# Altium PCB PCB1.PcbDoc
Units mm, origin at the board's own origin, x right, y up, seen from the top; angles counter-clockwise.
Board outline 33.6 x 35.4 mm, 2 copper layers (Top Layer, Bottom Layer), stack 1.671 mm thick; 28 components, 12 nets, 67 pads, 14 vias.
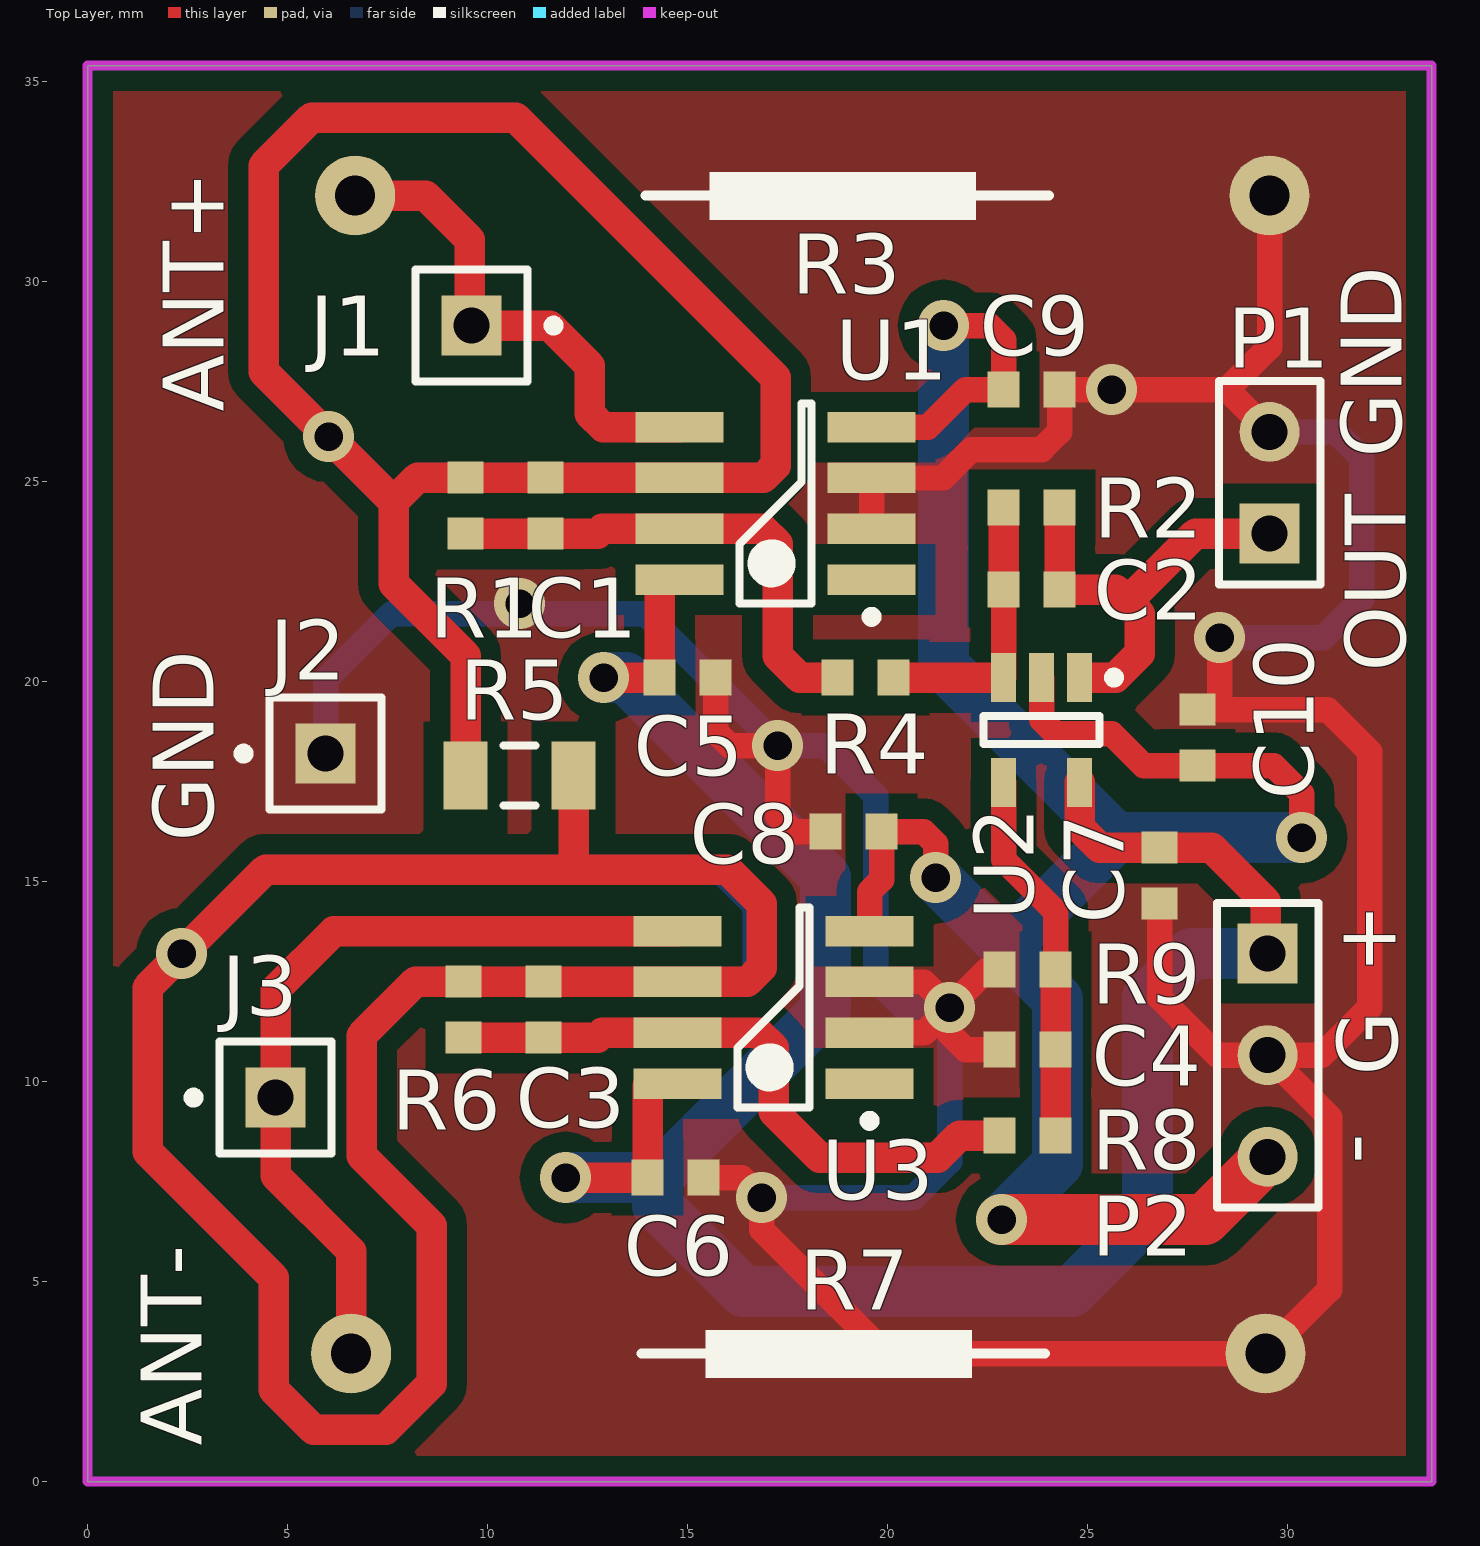
[diagram p0: Top Layer view]
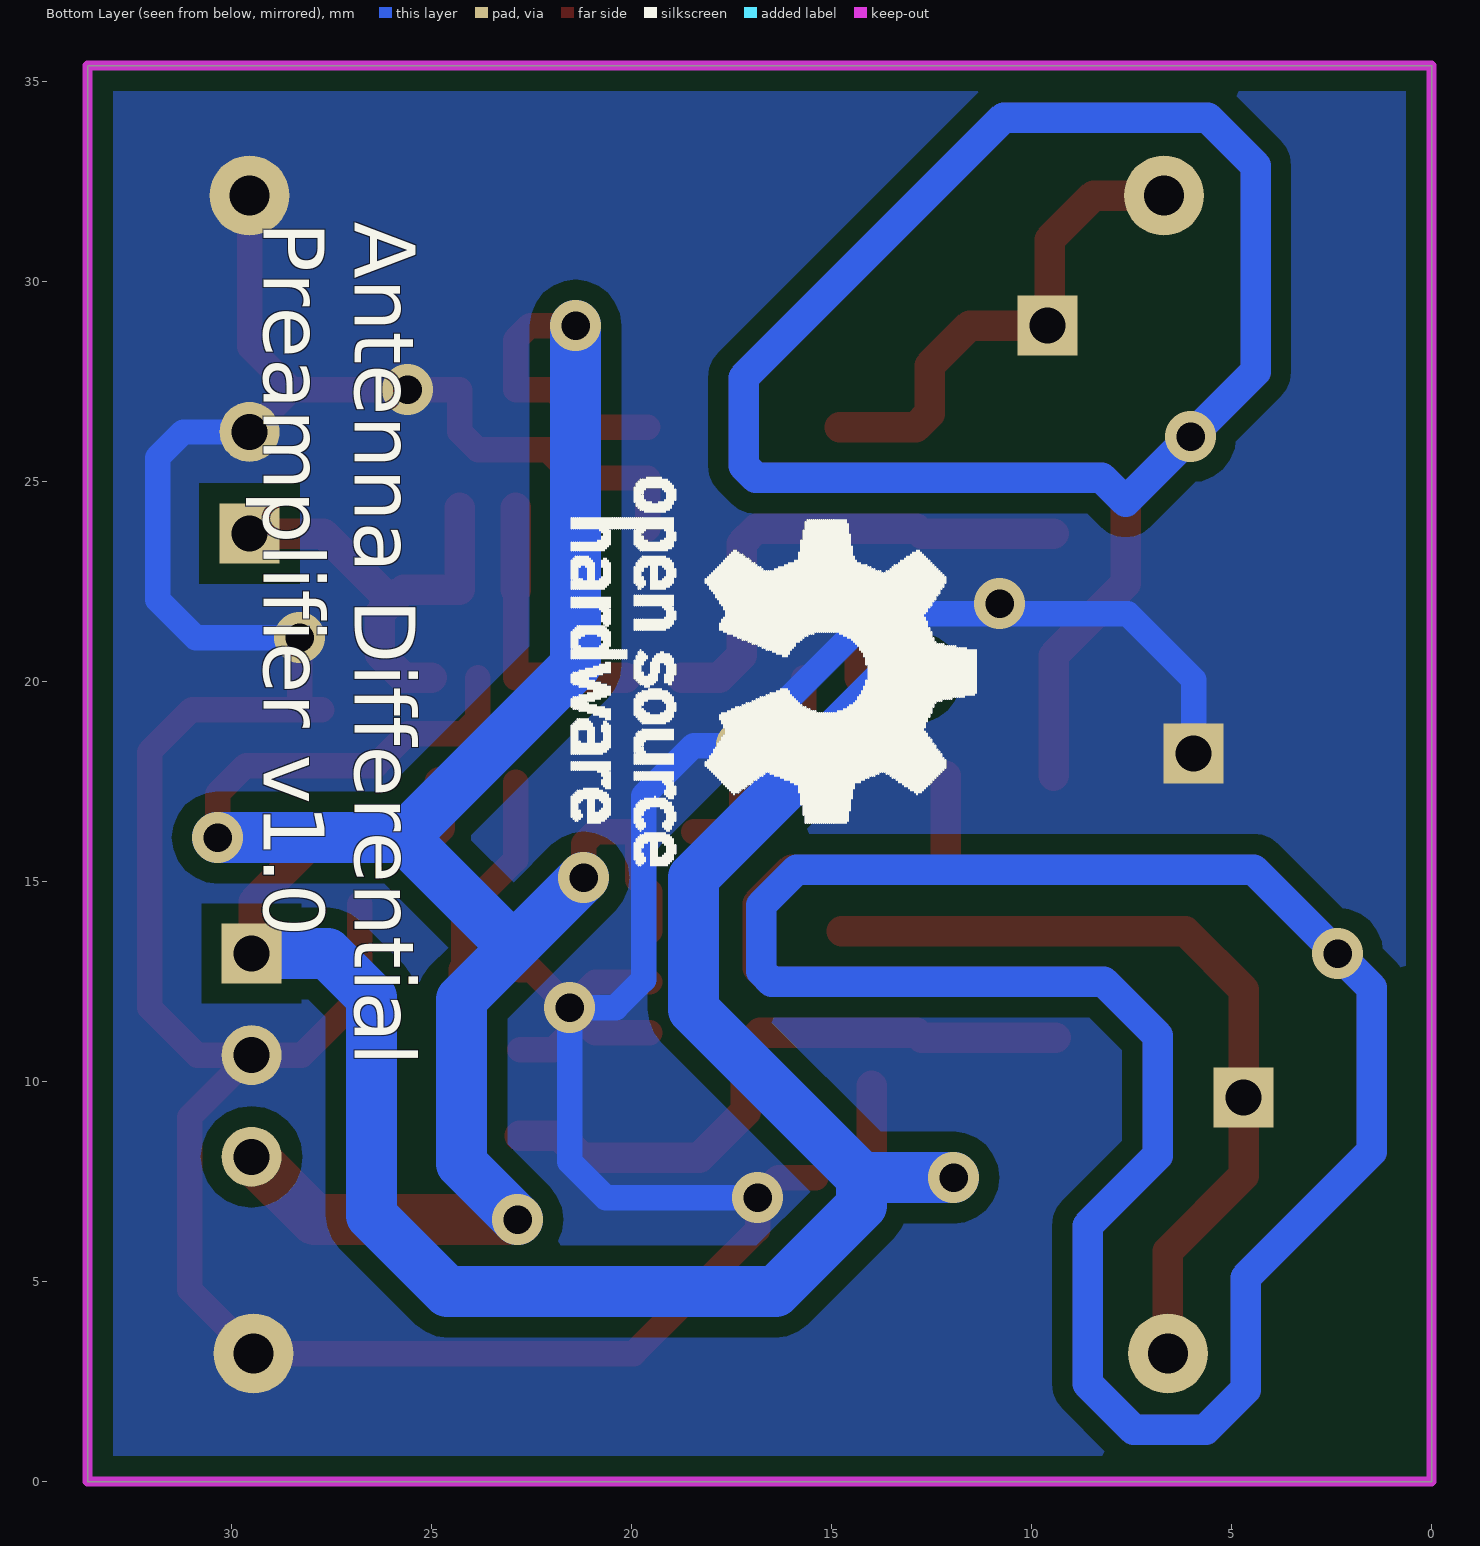
[diagram p1: Bottom Layer view, seen from below]

## Layer stack, top to bottom
Top Solder: solder mask 0.0102, Solder Resist, Dk 3.5
Top Layer: signal copper 0.0356
Dielectric1: core 1.6, FR-4, Dk 4.8
Bottom Layer: signal copper 0.0356
Bottom Solder: solder mask 0.0102, Solder Resist, Dk 3.5

## Board outline
0,0 0,35.4 33.6,35.4 33.6,0

## Design rules (kind name [scope] priority, off if disabled: settings)
Clearance Clearance_3 [InNamedPolygon('bottom_GND') vs not InNet('GND')] p1: gap=0.508
Clearance Clearance_2 [InNamedPolygon('top_GND') vs not InNet('GND')] p2: gap=0.508
Clearance Clearance_1 [OnLayer('Bottom Layer') vs OnLayer('Bottom Layer')] p3: gap=0.279
Clearance [OnLayer('Top Layer') vs OnLayer('Top Layer')] p4: gap=0.279
ComponentClearance [All] p1: gap=0 collisioncheckmode=3 verticalgap=0 showdistances=FALSE
DiffPairsRouting [All] p1: maxlimit=2.54 minlimit=0.203 mostfreqgap=0.254 toplayer_minwidth=0.381 toplayer_maxwidth=0.381 toplayer_prefwidth=0.381 bottomlayer_minwidth=0.381 bottomlayer_maxwidth=0.381 bottomlayer_prefwidth=0.381 maxuncoupledlength=12.7
MinimumSolderMaskSliver [All] p1: minsoldermaskwidth=0
PlaneConnect [All] p1: planeconnectstyle=Direct reliefexpansion=0.508 reliefentries=4 reliefconductorwidth=0.254 reliefairgap=0.254
PolygonConnect [All] p1: connectstyle=Direct reliefconductorwidth=0.254 reliefentries=4 polygonreliefangle="90 Angle" airgapwidth=0.254
RoutingVias [All] p1: holewidth=0.3 width=0.6 viastyle="Through Hole" minholewidth=0.3 minwidth=0.6 maxholewidth=0.3 maxwidth=0.6
SilkToSilkClearance [All] p1: silktosilkclearance=0
SilkToSolderMaskClearance SilkscreenOverComponentPads [IsPad] p1: minsilkscreentomaskgap=0 clearancetoexposedcopper=TRUE
SolderMaskExpansion [All] p1: expansion=0.102
Width [All] p1: maxlimit=2.54 minlimit=0.203 preferedwidth=0.254
24 further rules are at their usual default settings.

## Components (designator, comment, footprint, x,y, rotation, side; value= is the part's Value field where it differs from the comment)
C1 "0603" 1608[0603] 11.45,24.4 r90 top
C2 "0603" 1608[0603] 23.6,22.3 r180 top
C3 "0603" 1608[0603] 11.4,11.8 r90 top
C4 "0603" 1608[0603] 23.5,10.8 r0 top
C5 "0603" 1608[0603] 15,20.1 r180 top
C6 "0603" 1608[0603] 14.7,7.6 r180 top
C7 "0603" 1608[0603] 26.8,15.15 r90 top
C8 "0603" 1608[0603] 19.15,16.25 r0 top
C9 "0603" 1608[0603] 23.6,27.3 r180 top
C10 "0603" 1608[0603] 27.75,18.6 r270 top
J1 "ANT+" PIN1 9.6,28.9 r270 top
J2 "ANT GND" PIN1 5.95,18.2 r90 top
J3 "ANT-" PIN1 4.7,9.6 r90 top
P1 "OUT" HDR1X2 29.55,23.7 r90 top
P2 "POWER" HDR1X3 29.5,13.2 r270 top
R1 "0603" 1608[0603] 9.45,24.4 r270 top
R2 "0603" 1608[0603] 23.6,24.35 r0 top
R3 "SM104031007FE" OHMITE_SM104031007FE_THROUGHHOLERESISTOR 29.55,32.15 r180 top
R4 "0603" 1608[0603] 19.45,20.1 r0 top
R5 "1206" C1206 10.8,17.65 r180 top
R6 "0603" 1608[0603] 9.4,11.8 r270 top
R7 "SM104031007FE" OHMITE_SM104031007FE_THROUGHHOLERESISTOR 29.45,3.2 r180 top
R8 "0603" 1608[0603] 23.5,8.65 r0 top
R9 "0603" 1608[0603] 23.5,12.8 r180 top
U1 "LTC6241" LTC6241_SOIC8 19.6,22.55 r180 top
U2 "LTC6240" LTC6240_SOT23 24.8,20.1 r270 top
U3 "LTC6241" LTC6241_SOIC8 19.55,9.95 r180 top
? "Comment" "OpenSourceLOGO small" 16.35,20.15 r270 bottom

## Footprints (in the part's own frame and the unit in brackets; to place one, negate y for a bottom-side part, rotate by r counter-clockwise, add the part's x,y. Pads: shape width x height; smd on the part's side, far side on the other; paste and mask are expansions set on the pad)
1608[0603] [mm] "Chip Capacitor, Body 1.6x0.8mm, IPC High Density"
  rect 0.8x0.9 smd: 1(-0.7,0) 2(0.7,0)
  body extent -0.87,-0.48 0.87,0.48, height 1.3
C1206 [mm] "Chip Capacitor, Body 3.2x1.6mm, IPC High Density"
  rect 1.1x1.7 smd: 1(-1.35,0) 2(1.35,0)
  silkscreen extent -0.4,-0.75 0.4,0.75, body extent -1.7,-0.9 1.7,0.9, height 1.3
HDR1X2 [mm] "Connector; Header; 2 Position"
  rect 1.5x1.5 hole 0.9: 1(0,0)
  round 1.5 hole 0.9: 2(2.54,0)
  silkscreen extent -1.27,-1.27 3.81,1.27
HDR1X3 [mm] "Connector; Header; 3 Position"
  rect 1.5x1.5 hole 0.9: 1(0,0)
  round 1.5 hole 0.9: 2(2.54,0) 3(5.08,0)
  silkscreen extent -1.27,-1.27 6.35,1.27
LTC6240_SOT23 [mm] "SOT23, 5-Leads, Body 2,9x2,8mm (max), Pitch 0,95mm, IPC Medium Density"
  rect 1.22x0.62 smd: 1(0,0) 2(0,-0.95) 3(0,-1.9) 4(2.62,-1.9) 5(2.62,0)
  silkscreen extent -0.12,-2.4 1.66,0.99, body extent 0.44,-2.4 2.18,0.5, height 1
LTC6241_SOIC8 [mm] "SOIC, 8-Leads, Body 5,0x4,0mm (max), Pitch 1,27mm, IPC Medium Density"
  rect 2.2x0.762 smd: 1(0,0) 2(0,-1.27) 3(0,-2.54) 4(0,-3.81) 5(4.8,-3.81) 6(4.8,-2.54) 7(4.8,-1.27) 8(4.8,0)
  silkscreen extent -0.13,-4.41 3.3,1.06, body extent 0.41,-4.41 4.4,0.6, height 1.75
OHMITE_SM104031007FE_THROUGHHOLERESISTOR [mm]
  round 2 hole 1: 1(0,0) 2(22.86,0)
  silkscreen extent 5.51,-0.58 15.6,0.61, body extent -1.8,-1.27 24.8,1.27, height 8.8
"OpenSourceLOGO small" [mm]
  silkscreen extent -4.95,-5.15 4.75,4.96
PIN1 [mm] "Connector; Plug"
  rect 1.5x1.5 hole 0.9: 1(0,0)
  silkscreen extent -1.4,-1.4 1.4,2.18

## Part data
C1 C2 C3 C4 C5 C6 C7 C8 C9 C10: library part Cap, "Capacitor"
J1 J2 J3: library part Socket, "Socket"
P1: library part "Header 2", "Header, 2-Pin"
P2: library part "Header 3", "Header, 3-Pin"
R1 R2 R3 R4 R5 R6 R7 R8 R9: library part Res2, "Resistor"
U1 U3: "low noise, high input impedance opamp"
U2: "low noise jfet opamp"

## Via types
v1: diameter 1.27, hole 0.711, Top Layer to Bottom Layer, 14 vias

## Nets (pads, with @x,y where several pads share a name; then routed paths per layer and width w, separated by ;. In a path a pad name is that pad's centre, name@x,y a point inside that pad or via, vN(x,y) a via of type N, cw(c..) or ccw(c..) an arc to the next point about the centre after c; other vN are vias at no path point)
GND: C4.1 C5.1 C6.1 C7.1 C8.1 C9.1 C10.1 J2.1 P1.2 P2.2 R3.1 R7.1 R9.2 U1.2 U1.3 U3.2 U3.3 | length 123.5
  Top Layer w0.635: C6.1 16.35,7.6 v1(16.85,7.1) 16.85,6.3 19.95,3.2 R7.1 31.05,4.8 31.05,9.11 P2.2 ; C5.1 15.7,18.75 16.05,18.4 v1(17.25,18.4) 17.25,16.65 17.65,16.25 C8.1 ; U3.2 20.92,11.22 v1(21.55,11.85) ; U3.3 20.91,12.49 v1(21.55,11.85) ; U1.2 U1.3 21.39,25.09 22.1,25.8 23.85,25.8 24.3,26.25 C9.1 28.49,27.3 ; C4.1 21.95,10.8 21.55,11.2 v1(21.55,11.85) ; R9.2 22.5,12.8 v1(21.55,11.85) ; C7.1 26.8,12.1 28.24,10.66 P2.2 ; C10.1 28.35,19.3 ; v1(28.3,21.1) 28.3,19.35 28.35,19.3 ; P1.2 28.49,27.3 ; R3.1 29.55,28.36 28.49,27.3 ; 28.35,19.3 31,19.3 32.05,18.25 32.05,11.85 30.86,10.66 P2.2
  Bottom Layer w0.635: J2.1 5.95,20.05 7.6,21.7 13.95,21.7 v1(17.25,18.4) 18.45,18.4 19.7,17.15 19.7,12.55 20.4,11.85 v1(21.55,11.85) 21.55,8 20.65,7.1 v1(16.85,7.1) ; v1(28.3,21.1) 30.9,21.1 31.85,22.05 31.85,25.6 31.21,26.24 P1.2
  other v1: 10.8,21.95 25.6,27.3
NetC1_1: C1.1 R1.2 R4.1 U1.7 | length 12.5
  Top Layer w0.762: R1.2 C1.1 12.75,23.7 12.87,23.82 U1.7 16.88,23.82 17.25,23.45 17.25,20.65 17.8,20.1 R4.1
NetC1_2: C1.2 R1.1 R5.2 U1.6 | length 86.7
  Top Layer w0.762: R5.2 9.45,20.65 7.65,22.45 7.65,24.5 ; 7.65,24.5 8.25,25.1 R1.1 C1.2 ; 7.65,24.5 v1(6.025,26.125) 4.4,27.75 4.4,32.9 5.6,34.1 10.7,34.1 17.2,27.6 17.2,25.4 16.89,25.09 U1.6 U1.6@14.79,25.1 ; C1.2 U1.6@14.79,25.1 ; C1.2 U1.6@14.79,25.1
  Bottom Layer w0.762: 4.4,27.75 4.4,32.9 5.6,34.1 10.7,34.1 17.2,27.6 17.2,25.4 16.89,25.09 8.24,25.09 7.65,24.5 v1(6.025,26.125) 4.4,27.75
NetC2_1: C2.1 P1.1 R2.2 U2.1 | length 11.1
  Top Layer w0.762: R2.2 C2.1 25.7,22.3 26,22 ; U2.1@25,20.1 25.7,20.1 26.3,20.7 26.3,21.7 26,22 ; P1.1 27.7,23.7 26,22
NetC2_2: C2.2 R2.1 R4.2 U2.3 | length 6.8
  Top Layer w0.635: U2.3 C2.2
  Top Layer w0.762: R4.2 U2.3@22.7,20.1 ; C2.2 R2.1
NetC3_1: C3.1 R6.2 R8.1 U3.7 | length 15.9
  Top Layer w0.762: R6.2 C3.1 12.75,11.1 12.87,11.22 U3.7 16.78,11.22 17.15,10.85 17.15,9.25 18.3,8.1 21.25,8.1 21.8,8.65 R8.1
NetC3_2: C3.2 R5.1 R6.1 U3.6 | length 111.9
  Top Layer w0.762: R5.1 12.15,15.35 12.2,15.3 ; 12.2,15.3 4.45,15.3 1.5,12.35 1.5,8.25 4.65,5.1 4.65,2.3 5.65,1.3 7.45,1.3 8.6,2.45 8.6,6.4 6.85,8.15 6.85,11.15 8.2,12.5 R6.1 C3.2 11.41,12.49 U3.6 16.49,12.49 16.85,12.85 16.85,14.45 16,15.3 12.2,15.3
  Bottom Layer w0.762: 1.5,8.25 1.5,12.35 v1(2.35,13.2) 4.45,15.3 15.868,15.3 16.755,14.413 16.755,12.755 16.49,12.49 8.19,12.49 6.85,11.15 6.85,8.15 8.6,6.4 8.6,2.45 7.45,1.3 5.65,1.3 4.65,2.3 4.65,5.1 1.5,8.25
NetC4_2: C4.2 R8.2 R9.1 U2.4 | length 9.4
  Top Layer w0.635: U2.4 22.9,15.55 24.2,14.25 R9.1
  Top Layer w0.762: R8.2 C4.2 R9.1
NetJ1_1: J1.1 R3.2 U1.5 | length 12.4
  Top Layer w0.762: R3.2 8.45,32.15 9.55,31.05 9.55,28.95 J1.1 11.55,28.9 12.55,27.9 12.55,26.7 12.89,26.36 U1.5
NetJ3_1: J3.1 R7.2 U3.5 | length 20.5
  Top Layer w0.762: R7.2 6.59,5.76 4.7,7.65 J3.1 4.7,12.3 6.16,13.76 U3.5
VCC: C5.2 C6.2 C7.2 P2.1 U1.8 U2.5 U3.8 | length 58.7
  Top Layer w0.762: v1(11.95,7.6) C6.2 U3.8@14,9.9 ; v1(12.9,20.1) C5.2 U1.8@14.3,22.45 ; U2.5 24.8,16.35 25.3,15.85 C7.2 28.1,15.85 29.45,14.5 29.45,13.25 P2.1
  Bottom Layer w1.27: v1(11.95,7.6) 14.25,7.6 ; v1(12.9,20.1) 13.45,20.1 18.45,15.1 18.45,11.8 14.25,7.6 ; P2.1 27.6,13.2 26.5,12.1 26.5,6.65 24.6,4.75 16.4,4.75 14.25,6.9 14.25,7.6
VEE: C8.2 C9.2 C10.2 P2.3 U1.4 U2.2 U3.4 | length 61.8
  Top Layer w0.635: U3.4 19.55,14.75 19.85,15.05 C8.2 20.9,16.25 21.2,15.95 v1(21.2,15.1) ; U1.4 21.01,26.36 21.95,27.3 C9.2 22.9,28.55 22.55,28.9 v1(21.4,28.9) ; U2.2 23.85,19.05 24.2,18.7 25.6,18.7 26.4,17.9 C10.2 29.65,17.9 30.35,17.2 v1(30.35,16.1)
  Top Layer w1.27: v1(22.85,6.55) 27.93,6.55 P2.3
  Bottom Layer w1.27: v1(21.2,15.1) 22.95,13.35 ; v1(21.4,28.9) 21.4,20.4 25.7,16.1 ; v1(22.85,6.55) 24.25,7.95 24.25,12.05 22.95,13.35 ; v1(30.35,16.1) 25.7,16.1 ; 22.95,13.35 25.7,16.1
pads on no net: U1.1 U3.1

## Polygon pours and split planes (outlines as drawn)
no net on Bottom Solder "bottom_solder+" (solid): 3.9,27.65 7.3,24.25 8.15,24.25 8.5,24.6 8.6,24.6 17.05,24.6 17.65,25.2 17.65,27.75 17.65,27.8 10.85,34.6 5.5,34.6 5.4,34.6 4,33.2 3.9,33.1 3.9,27.65
no net on Bottom Solder "bottom_solder-" (solid): 1.05,12.45 1.05,8.05 4.15,4.95 4.15,2.25 4.15,2.2 5.45,0.9 5.5,0.85 7.6,0.85 9,2.25 9.05,2.3 9.05,6.6 9,6.6 7.3,8.3 7.3,10.95 8.4,12.05 16.6,12.05 16.65,12.05 17.25,12.65 17.25,14.6 17.25,14.65 16.15,15.75 4.4,15.75 4.3,15.75 1.05,12.5
no net on Top Solder "top_solder+" (solid): 3.9,27.65 7.3,24.25 8.15,24.25 8.5,24.6 8.6,24.6 17.05,24.6 17.65,25.2 17.65,27.75 17.65,27.8 10.85,34.6 5.5,34.6 5.4,34.6 4,33.2 3.9,33.1 3.9,27.65
no net on Top Solder "top_solder-" (solid): 1.05,12.45 1.05,8.05 4.15,4.95 4.15,2.25 4.15,2.2 5.45,0.9 5.5,0.85 7.6,0.85 9,2.25 9.05,2.3 9.05,6.6 9,6.6 7.3,8.3 7.3,10.95 8.4,12.05 16.6,12.05 16.65,12.05 17.25,12.65 17.25,14.6 17.25,14.65 16.15,15.75 4.4,15.75 4.3,15.75 1.05,12.5
GND on Top Layer "top_GND" (solid, remove dead copper, pour order 4): 0,0 0,35.4 33.6,35.4 33.6,0
GND on Bottom Layer "bottom_GND" (solid, remove dead copper, pour order 6): 0,0 0,35.4 33.6,35.4 33.6,0
no net on Top Paste "top_paste+" (solid): 3.9,27.65 7.3,24.25 8.15,24.25 8.5,24.6 8.6,24.6 17.05,24.6 17.65,25.2 17.65,27.75 17.65,27.8 10.85,34.6 5.5,34.6 5.4,34.6 4,33.2 3.9,33.1 3.9,27.65
no net on Top Paste "top_paste-" (solid): 1.05,12.45 1.05,8.05 4.15,4.95 4.15,2.25 4.15,2.2 5.45,0.9 5.5,0.85 7.6,0.85 9,2.25 9.05,2.3 9.05,6.6 9,6.6 7.3,8.3 7.3,10.95 8.4,12.05 16.6,12.05 16.65,12.05 17.25,12.65 17.25,14.6 17.25,14.65 16.15,15.75 4.4,15.75 4.3,15.75 1.05,12.5
no net on Bottom Paste "bottom_paste+" (solid): 3.9,27.65 7.3,24.25 8.15,24.25 8.5,24.6 8.6,24.6 17.05,24.6 17.65,25.2 17.65,27.75 17.65,27.8 10.85,34.6 5.5,34.6 5.4,34.6 4,33.2 3.9,33.1 3.9,27.65
no net on Bottom Paste "bottom_paste-" (solid): 1.05,12.45 1.05,8.05 4.15,4.95 4.15,2.25 4.15,2.2 5.45,0.9 5.5,0.85 7.6,0.85 9,2.25 9.05,2.3 9.05,6.6 9,6.6 7.3,8.3 7.3,10.95 8.4,12.05 16.6,12.05 16.65,12.05 17.25,12.65 17.25,14.6 17.25,14.65 16.15,15.75 4.4,15.75 4.3,15.75 1.05,12.5

## Keep-outs
Keep-Out Layer:
  the board outline again, w0.25

## Other copper
Top Layer:
  pour cut-out: 4.45,15.3 1.5,12.35 1.5,8.25 4.65,5.1 4.65,2.3 5.65,1.3 7.45,1.3 8.6,2.45 8.6,6.4 6.85,8.15 6.85,11.15 8.2,12.5 8.21,12.49 16.49,12.49 16.85,12.85 16.85,14.45 16,15.3
  pour cut-out: 7.65,24.5 4.4,27.75 4.4,32.9 5.6,34.1 10.7,34.1 17.2,27.6 17.2,25.4 16.89,25.09 8.26,25.09 8.25,25.1
Bottom Layer:
  pour cut-out: 16,15.3 4.45,15.3 1.5,12.35 1.5,8.25 4.65,5.1 4.65,2.3 5.65,1.3 7.45,1.3 8.6,2.45 8.55,2.5 8.55,6.45 6.85,8.15 6.85,11.15 8.2,12.5 8.21,12.49 16.49,12.49 16.85,12.85 16.85,14.45
  pour cut-out: 7.65,24.5 4.4,27.75 4.4,32.9 5.6,34.1 10.7,34.1 17.2,27.6 17.2,25.4 16.89,25.09 8.26,25.09 8.25,25.1

## Silkscreen, mask and mechanical layers (free items; w line width, h text height)
Top Overlay:
  text "ANT+" at 3.4,26.75 h1.52 r90
  text "GND" at 32.85,25.6 h1.52 r90
  text "OUT" at 32.95,20.25 h1.52 r90
  text "GND" at 3.15,16 h1.52 r90
  text "+" at 32.7,12.7 h1.52 r90
  text "G" at 32.75,10.15 h1.52 r90
  text "-" at 31.2,8.7 h1.52 r270
  text "ANT-" at 2.85,0.9 h1.52 r90
Bottom Overlay:
  text "Antenna Differential / Preamplifier v1.0" at 29.2,31.5 h1.52 r90
Top Paste:
  pour cut-out: 4.85,27.95 5.95,26.85 6.3,26.85 6.75,26.4 6.75,26.05 7.65,25.15 8.05,25.55 16.7,25.55 16.75,25.6 16.75,27.4 10.5,33.65 5.8,33.65 4.85,32.7
  pour cut-out: 1.95,8.45 5.1,5.3 5.1,2.5 5.85,1.75 7.25,1.75 8.15,2.65 8.15,6.2 6.4,7.95 6.4,11.35 8,12.95 16.3,12.95 16.4,13.05 16.4,14.25 15.8,14.85 4.65,14.85 3.15,13.35 3.15,12.85 2.7,12.4 2.2,12.4 1.95,12.15
Bottom Paste:
  pour cut-out: 4.85,27.95 5.95,26.85 6.3,26.85 6.75,26.4 6.75,26.05 7.65,25.15 8.05,25.55 16.7,25.55 16.75,25.6 16.75,27.4 10.5,33.65 5.8,33.65 4.85,32.7
  pour cut-out: 1.95,8.45 5.1,5.3 5.1,2.5 5.85,1.75 7.25,1.75 8.15,2.65 8.15,6.2 6.4,7.95 6.4,11.35 8,12.95 16.3,12.95 16.4,13.05 16.4,14.25 15.8,14.85 4.65,14.85 3.15,13.35 3.15,12.85 2.7,12.4 2.2,12.4 1.95,12.15